# Altium PCB WiFi_Lock.PcbDoc
Units mil, origin at the board's own origin, x right, y up, seen from the top; angles counter-clockwise.
Board outline 2560 x 1180 mil, 2 copper layers (Top Layer, Bottom Layer); 49 components, 35 nets, 174 pads, 195 vias.
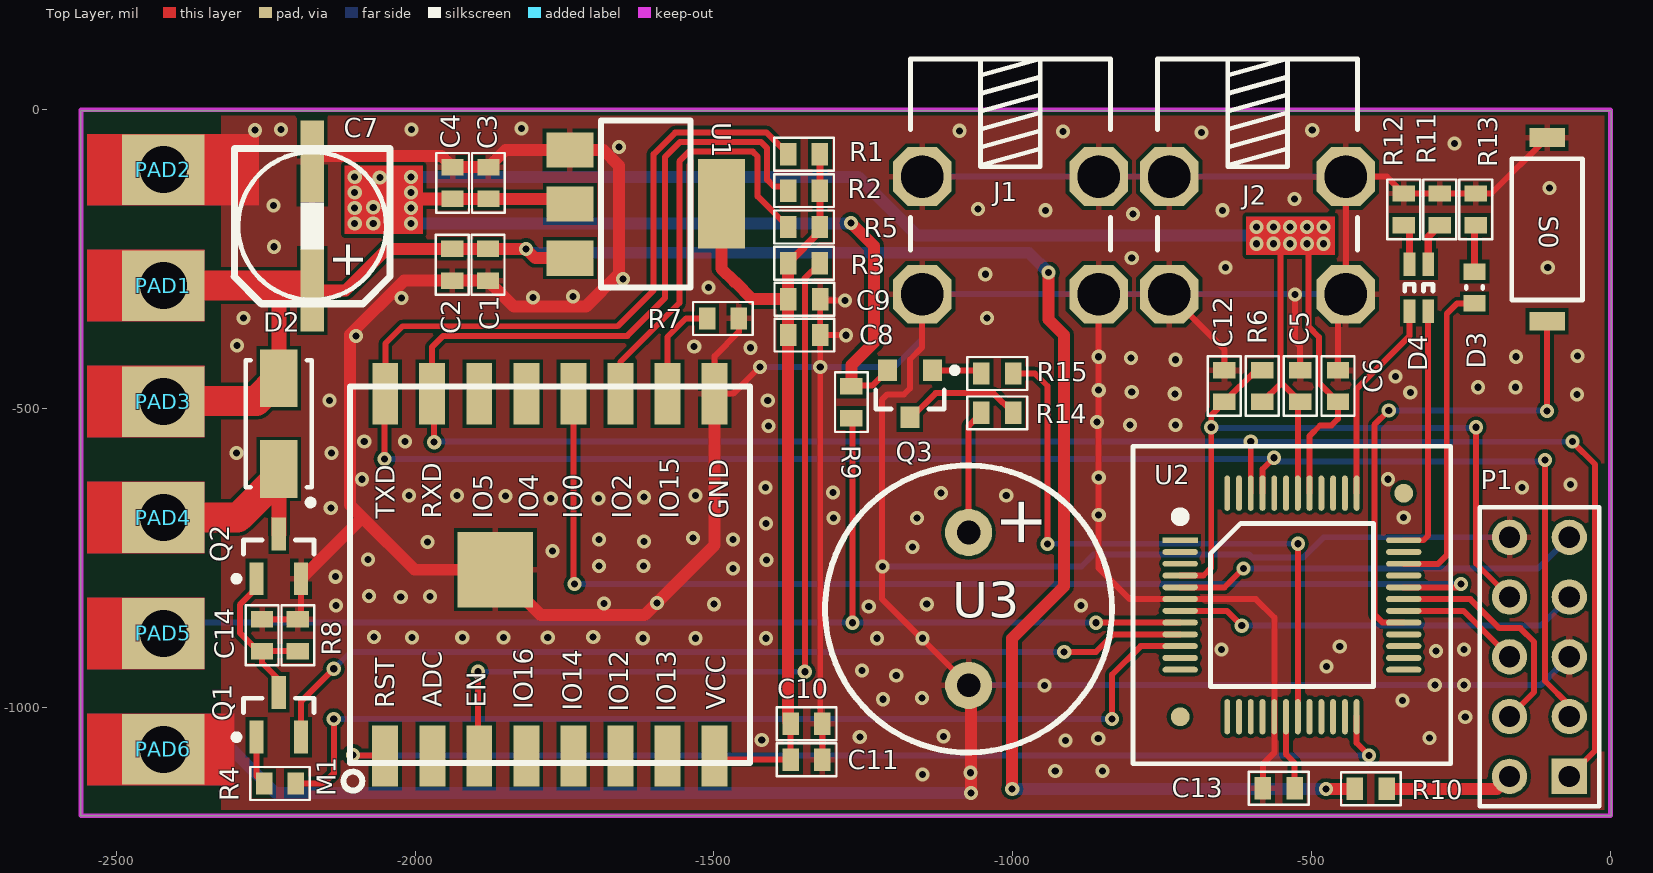
[diagram p0: Top Layer view]
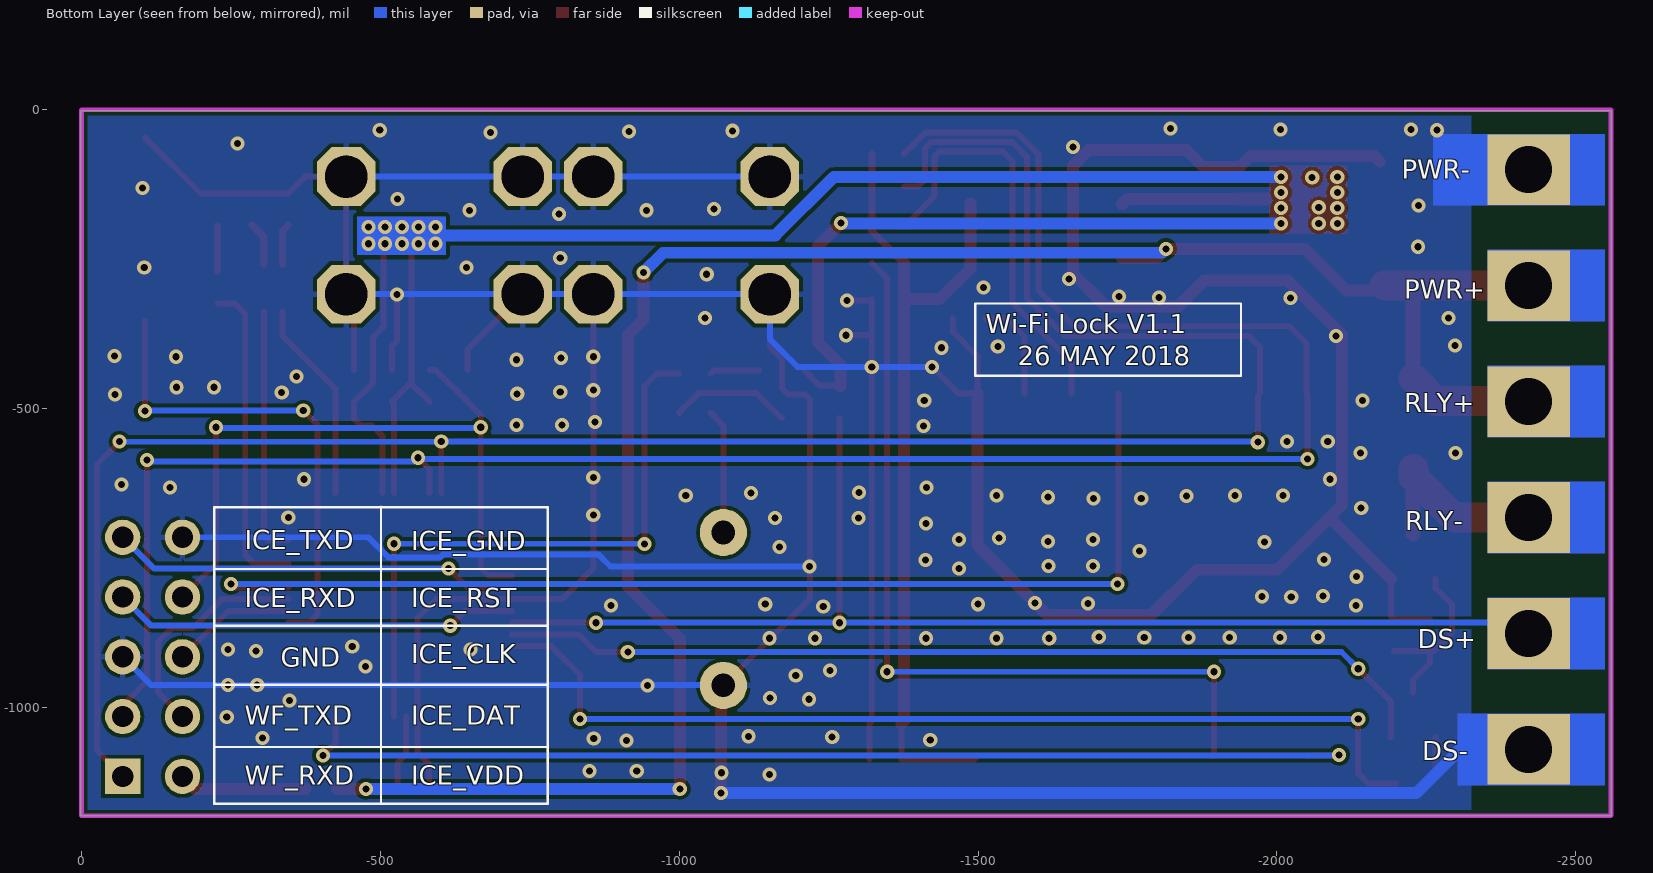
[diagram p1: Bottom Layer view, seen from below]

## Layer stack, top to bottom
Top Layer: signal copper 1.4
Dielectric: dielectric 12.6, FR-4, Dk 4.8
Bottom Layer: signal copper 1.4

## Board outline
-2559.06,-1.1 -2559.06,-1181.1 0.94,-1181.1 0.94,-1.1 -2559.06,-1.1

## Design rules (kind name [scope] priority, off if disabled: settings)
Clearance [All] p1: gap=6
HoleSize [All] p1: absolutevalues=TRUE maxlimit=248.03 minlimit=7.87 maxpercent=80.000 minpercent=20.000
MinimumSolderMaskSliver [All] p1: minsoldermaskwidth=0
PolygonConnect PolygonConnect_Via [IsVia] p1: connectstyle=Direct reliefconductorwidth=10 reliefentries=4 polygonreliefangle="90 Angle"
PolygonConnect [All] p2: connectstyle=Relief reliefconductorwidth=10 reliefentries=4 polygonreliefangle="90 Angle"
RoutingVias [All] p1: holewidth=15.75 width=19.68 viastyle="Through Hole" minholewidth=11.81 minwidth=23.62 maxholewidth=248.03 maxwidth=259.84
SilkToSilkClearance [All] p1: silktosilkclearance=0
SilkscreenOverComponentPads [IsPad] p1: minsilkscreentomaskgap=0
SolderMaskExpansion [All] p1: expansion=4
TestPointUsage [All] p1: valid=0 allowmultiple=FALSE
Testpoint [All] p1: side=3 testpointundercomponent=TRUE minsize=40 maxsize=100 preferedsize=60 minholesize=0 maxholesize=40 preferedholesize=32 testpointgrid=1 style=297 order=0-112345678
Width [All] p1: maxlimit=50 minlimit=5 preferedwidth=10
20 further rules are at their usual default settings.

## Components (designator, comment, footprint, x,y, rotation, side; value= is the part's Value field where it differs from the comment)
C1 "10uF" 0603 -1878,-259.02 r270 top
C2 "100nF" 0603 -1938,-259.02 r270 top
C3 "10uF" 0603 -1877.27,-122.24 r90 top
C4 "100nF" 0603 -1937.27,-122.24 r90 top
C5 "100nF" 0603 -519.33,-462 r90 top
C6 "100nF" 0603 -456,-462 r90 top
C7 "220uF" SMD-EC-F6.3 -2172,-302 r90 top
C8 "10uF" 0603 -1348.72,-376.73 r0 top
C9 "100nF" 0603 -1348.72,-316.73 r0 top
C10 "10uF" 0603 -1345,-1027 r0 top
C11 "100nF" 0603 -1345,-1087 r0 top
C12 "10uF" 0603 -646,-462 r90 top
C13 "10uF" 0603 -555,-1135 r180 top
C14 "100pF" 0603 -2256,-879 r90 top
D2 "SS32" DO-214AC -2228,-525 r270 top
D3 "LED" 0603 -227.46,-297 r90 top
D4 "LED" DLED2.00x1.25mm -320.73,-297.51 r270 top
J1 "Terminal Screw 4-PIN PCB RA" TERMSCREW4-B11.5X8.5X7.8mm/T5.0X7.5mm/RA -1003.94,-210 r180 top locked
J2 "Terminal Screw 4-PIN PCB RA" TERMSCREW4-B11.5X8.5X7.8mm/T5.0X7.5mm/RA -590.55,-210 r180 top locked
M1 "ESP07S" "ESP-07S Module" -1744,-778 r90 top
P1 "Header 2*5" HDR2X5T0.1 -169,-1115 r90 top
PAD1 "PWR+" PAD-MUL-ROUND-D1.5H0.6 -2421,-294 r90 top
PAD2 "PWR-" PAD-MUL-ROUND-D1.5H0.6 -2421,-100 r90 top
PAD3 "RLY+" PAD-MUL-ROUND-D1.5H0.6 -2421,-488 r90 top
PAD4 "RLY-" PAD-MUL-ROUND-D1.5H0.6 -2421,-682 r90 top
PAD5 "DS+" PAD-MUL-ROUND-D1.5H0.6 -2421,-876 r90 top
PAD6 "DS-" PAD-MUL-ROUND-D1.5H0.6 -2421,-1070 r90 top
Q1 "MMBT5401" SOT95P230X110-3N -2228,-1012 r90 top
Q2 "AO3400" SOT95P230X110-3N -2228,-747 r90 top
Q3 "MMBT5401LT1G" ONSC-SOT-23-3-318-08_V -1172,-475 r270 top
R1 "10k" 0603 -1349.2,-74 r0 top
R2 "10k" 0603 -1349.2,-135 r0 top
R3 "4.7k" 0603 -1349.2,-256.44 r0 top
R4 "10k" 0603 -2226,-1127 r180 top
R5 "4.7k" 0603 -1349.2,-196 r0 top
R6 "10k" 0603 -582.67,-462 r90 top
R7 "4.7k" 0603 -1485,-349 r0 top
R8 "33k" 0603 -2196,-879 r270 top
R9 "33k" 0603 -1270,-489 r90 top
R10 "0R" 0603 -401,-1136 r180 top
R11 "100R" 0603 -285.73,-166.49 r270 top
R12 "100R" 0603 -345.73,-166.49 r270 top
R13 "100R" 0603 -225.73,-166.49 r270 top
R14 "51R" 0603 -1026,-507 r0 top
R15 "4.7k" 0603 -1026,-441 r0 top
S0 "KEY0" SW6.00x3.00mm -106,-200 r90 top
U1 "AMS1117" SOT-223 -1741,-67 r270 top
U2 "M0516LDN" LQFP-48 -720,-720 r0 top
U3 "AT-1220-TT-R" Transducer_12mm(D)x8.5mm(H)_6.5mm(P) -1074,-835 r270 top

## Footprints (in the part's own frame and the unit in brackets; to place one, negate y for a bottom-side part, rotate by r counter-clockwise, add the part's x,y. Pads: shape width x height; smd on the part's side, far side on the other; paste and mask are expansions set on the pad)
0603 [mm] "0603 Chip Component, 2-Leads, Body 1.6x0.8mm, IPC Medium Density"
  rect 0.7x0.95 smd: 1(-0.675,0) 2(0.675,0)
  silkscreen extent -1.27,-0.7 1.27,0.7, body extent -0.77,-0.43 0.77,0.43, height 0.5
DLED2.00x1.25mm [mm] "Dual color LED, 4-Leads, Body 2.00x1.25mm, IPC Medium Density"
  rect 1x0.5 smd: 1(-1,0.4) 2(1,0.4) 3(-1,-0.4) 4(1,-0.4)
  silkscreen extent -0.15,-0.6 0.15,0.6, body extent -1.05,-0.67 1.05,0.67, height 1.1
DO-214AC [mm] "Molded Diode, 2-Leads, Body 5.0x2.5mm, IPC Medium Density"
  rect 2.45x1.6 smd: 1(1.925,0) 2(-1.925,0)
  silkscreen extent -2.7,-1.4 3.47,1.48, body extent -2.65,-1.4 2.65,1.4, height 2.3
"ESP-07S Module" [mm]
  rect 3.2x3.2 smd: 0(0.22,3.092)
  rect 2.6x1.1 smd: 1(-7.7,7.775) 2(-7.7,5.762) 3(-7.7,3.775) 4(-7.7,1.775) 5(-7.7,-0.225) 6(-7.7,-2.225) 7(-7.7,-4.225) 8(-7.7,-6.225) 9(7.7,-6.225) 10(7.7,-4.225) 11(7.7,-2.225) 12(7.7,-0.225) 13(7.7,1.775) 14(7.7,3.775) 15(7.7,5.775) 16(7.7,7.769)
  silkscreen extent -9.16,-7.73 8,9.54
HDR2X5T0.1 [mm] "Connector; Header; 2x5 Position; 2.54mm Pitch"
  rect 1.5x1.5 hole 0.9: 1(0,-2.54)
  round 1.5 hole 0.9: 2(0,0) 3(2.54,-2.54) 4(2.54,0) 5(5.08,-2.54) 6(5.08,0) 7(7.62,-2.54) 8(7.62,0) 9(10.16,-2.54) 10(10.16,0)
  silkscreen extent -1.27,-3.81 11.43,1.27
LQFP-48 [mm]
  rect 1.5x0.25 smd: 1(0,0)
  oval 1.5x0.25 smd: 2(0,-0.5) 3(0,-1) 4(0,-1.5) 5(0,-2) 6(0,-2.5) 7(0,-3) 8(0,-3.5) 9(0,-4) 10(0,-4.5) 11(0,-5) 12(0,-5.5) 25(9.5,-5.5) 26(9.5,-5) 27(9.5,-4.5) 28(9.5,-4) 29(9.5,-3.5) 30(9.5,-3) 31(9.5,-2.5) 32(9.5,-2) 33(9.5,-1.5) 34(9.5,-1) 35(9.5,-0.5) 36(9.5,0)
  oval 0.25x1.5 smd: 13(2,-7.5) 14(2.5,-7.5) 15(3,-7.5) 16(3.5,-7.5) 17(4,-7.5) 18(4.5,-7.5) 19(5,-7.5) 20(5.5,-7.5) 21(6,-7.5) 22(6.5,-7.5) 23(7,-7.5) 24(7.5,-7.5) 37(7.5,2) 38(7,2) 39(6.5,2) 40(6,2) 41(5.5,2) 42(5,2) 43(4.5,2) 44(4,2) 45(3.5,2) 46(3,2) 47(2.5,2) 48(2,2)
  round 0.8 smd: ""(0,-7.5) ""(9.5,2)
  silkscreen extent -2,-9.5 11.5,4
ONSC-SOT-23-3-318-08_V [mm] "SOT23, 3-Leads, Body 2.92x1.3mm, Pitch 0.95mm"
  rect 0.9x0.8 smd: 1(-1,0.95) 2(-1,-0.95) 3(1,0)
  silkscreen extent -1.12,-1.46 0.65,2.03, body extent -0.65,-1.46 0.65,1.46, height 1.11
PAD-MUL-ROUND-D1.5H0.6 [mm]
  rect 3x3.5 hole 2: 1(0,0)
SMD-EC-F6.3 [mm]
  rect 3.5x1 smd: 1(0,0) 2(5.475,0)
  silkscreen extent -0.56,-3.31 6.04,3.31
SOT95P230X110-3N [mm] "SOT23, 3-Leads, Body 2.90x2.30mm, Pitch 0.95mm, IPC Medium Density"
  rect 1.4x0.6 smd: 1(-0.95,0.95) 2(-0.95,-0.95) 3(0.95,0)
  silkscreen extent -1.07,-1.5 0.7,1.92, body extent -0.7,-1.5 0.7,1.5, height 1.1
SOT-223 [mil]
  rect 59x79 smd: 1(0,0) 2(90.55,0) 3(181.1,0)
  rect 150x79 smd: 4(89.88,253.54)
  silkscreen extent -49,52 231,202
SW6.00x3.00mm [mm] "Tact Switch, 2 Leads, Body 6.00(L) x 3.00(W) x 5.00(H) mm"
  rect 0.8x1.5 smd: 1(-3.9,0) 2(3.9,0)
  silkscreen extent -3,-1.5 3,1.5, body extent -3,-1.5 3,1.5, height 0.48
TERMSCREW4-B11.5X8.5X7.8mm/T5.0X7.5mm/RA [mm] "Terminal Screw, 4-PIN, Body 11.5mm(L) * 8.5mm(W) * 7.8mm(H), Thru Hole, 5.0mm * 7.5mm Pitch, Right Angle"
  oct 2.5x2.5 hole 1.8: 1(-3.75,2.5) 2(3.75,2.5) 3(-3.75,-2.5) 4(3.75,-2.5)
  silkscreen extent -4.25,-7.5 4.25,0.64, body extent -4.25,-7.5 4.25,4, height 16
Transducer_12mm(D)x8.5mm(H)_6.5mm(P) [mm] "Transducer, Body Dia 12.00mm, Height 8.7mm (max), 6.5mm Pitch"
  round 2 hole 1: 1(-3.25,0) 2(3.25,0)
  silkscreen extent -6.1,-6.1 6.1,6.1

## Part data
C1 C2 C3 C4 C5 C6 C8 C9 C10 C11 C12 C13 C14: library part CAP0603, "CAP0603"
C7: library part EEE-FPC221XAP, "220μF 16V Aluminum Electrolytic Capacitors Radial, Can - SMD 160 mohm @ 100kHz 2000 Hrs @ 105°C"
D2: library part Diode
D3: "Typical INFRARED GaAs LED"
D4: library part LED-RB, "Red & Blue"
J1 J2: "Terminal Screw 4-PIN, Thru Hole, PCB Right Angle"
M1: library part "ESP-07S Module", "ESP-07S Wi-Fi Module"
P1: "Header, 2-Pin, Dual row"
PAD1 PAD2 PAD3 PAD4 PAD5 PAD6: library part PAD, "Probe, Test Point"
Q1: "PNP General Purpose Amplifier"
Q2: "30V 5.8A N-Channel MOSFET, MAX VGS = 1.45V"
Q3: "High Voltage Transistor, PNP Silicon, 3-Pin SOT-23, Pb-Free, Tape and Reel"
R1 R2 R3 R4 R5 R6 R7 R8 R9 R10 R11 R12 R13 R14 R15: library part RES
S0: library part SW-TACT, "Top push Switch"
U1: "三端线性稳压"
U2: "ARM Cortex -M0 32-bit Microcontroller"
U3: "Buzzers Transducer, Externally Driven Magnetic 1.5V 10mA 2.048kHz 82dB @ 1.5V, 10cm Through Hole PC Pins"

## Via types
v1: diameter 23.62, hole 11.81, Top Layer to Bottom Layer, tented both sides, 189 vias
v2: diameter 23.62, hole 11.81, Top Layer to Bottom Layer, 6 vias

## Nets (pads, with @x,y where several pads share a name; then routed paths per layer and width w, separated by ;. In a path a pad name is that pad's centre, name@x,y a point inside that pad or via, vN(x,y) a via of type N, cw(c..) or ccw(c..) an arc to the next point about the centre after c; other vN are vias at no path point)
+3.3V: C3.1 C4.1 C5.1 C6.1 Q3.2 R6.1 R9.2 U1.2 U2.41 U2.42 | length 3844.5
  Top Layer w10: R9.2@-1270,-461.43 -1235.2,-461.43 Q3.2 ; R6.1 -552,-457.91 -552,-455.91 ; v1(-564,-196) -564,-201 -552,-213 -552,-455.91 ; U2.42 -523.15,-492.39 C5.1 -552,-455.91 ; -512,-210 -505,-217 -505,-363 -488,-380 -488,-456.57 C6.1 -456,-517 -467,-528 -486,-528 -503.46,-545.46 U2.41
  Top Layer w20: C4.1 C3.1 -1749.73,-148.82 U1.2 ; v1(-1271,-189) -1232,-228 -1232,-389 -1270,-427 -1270,-461.43 R9.2
  Bottom Layer w20: v1(-2007,-190) -1272,-190 v1(-1271,-189) ; v1(-2007,-112) -1259,-112 -1161,-210 -512,-210
  other v1: -592,-224 -564,-224 -536,-224 -508,-224 -480,-224 -592,-196 -536,-196 -508,-196 -480,-196 -2101,-190 -2070,-190 -2101,-164 -2007,-164 -2070,-163 -2101,-138 -2007,-138 -2059,-113 -2101,-112
+3.3V_WIFI: C8.1 C9.1 C10.1 C11.1 M1.8 R1.2 R2.2 R3.1 R5.2 U1.4 | length 1454.6
  Top Layer w10: M1.8 -1493.07,-1087 C11.1 C10.1 ; C8.1 C8.1@-1371.57,-380.45
  Top Layer w12: R3.1 -1322,-202.66 R5.2@-1322,-194 ; R2.2 R1.2 ; R5.2@-1322.43,-196 R2.2@-1322.43,-135 ; R2.2@-1322,-138 R2.2@-1322,-128
  Top Layer w20: U1.4 -1487.46,-265.54 -1465.27,-287.73 -1464.59,-287.73 -1435.59,-316.73 C9.1@-1375.78,-316.73 ; -1375.81,-348.25 -1375.81,-1022.76 C10.1 ; C8.1@-1375.78,-376.73 C9.1@-1375.78,-316.73 ; R3.1 C9.1@-1375.78,-316.73 ; C9.1 C9.1@-1375.78,-316.73
+12V: C1.1 C2.1 C7.1 D2.2 PAD1.1 PAD3.1 R10.2 U1.3 | length 3458.8
  Top Layer w20: C7.1 -2116,-302 -2046.44,-232.44 C2.1 C1.1 v1(-1814.56,-232.44) -1798.9,-248.1 U1.3 ; v1(-1001,-1136) -1001,-884 -914.19,-797.19 -914.19,-376.81 -940,-351 v1(-940,-272) ; v1(-476,-1136) R10.2
  Top Layer w25: -2229,-294 -2228,-295 D2.2 D2.2@-2228,-461
  Top Layer w50: PAD3.1 -2420,-487 -2265.79,-487 D2.2 ; PAD1.1 -2229,-294 C7.1@-2180,-294
  Bottom Layer w20: v1(-1814.56,-232.44) -1808,-239 -973,-239 v1(-940,-272) ; v1(-1001,-1136) v1(-476,-1136)
DETECT: PAD5.1 R9.1 U2.8 | length 2051
  Top Layer w10: v1(-1268,-858) R9.1@-1268,-515.57 ; v1(-861,-858) -860.79,-857.8 U2.8
  Bottom Layer w10: PAD5.1 -2403,-858 -1291,-858 v1(-861,-858)
FWUPD: M1.12 U2.32 | length 1900.4
  Top Layer w10: M1.12 -1735.14,-790.86 v1(-1733,-793) ; U2.32 -255.74,-798.74 v1(-250,-793)
  Bottom Layer w10: v1(-1733,-793) v1(-250,-793)
GND: C1.2 C2.2 C3.2 C4.2 C5.2 C6.2 C7.2 C8.2 C9.2 C10.2 C11.2 C12.2 C13.2 C14.2 J1.1 J1.2 J1.3 J1.4 J2.1 J2.2 J2.3 J2.4 M1.0 M1.9 P1.5 P1.10 PAD2.1 PAD6.1 Q2.2 R7.2 R8.1 R11.1 R12.1 R13.1 S0.2 U1.1 U2.6 U2.17 U3.2 | length 12206.5
  Top Layer w10: C14.2 R8.1 -2190.6,-847.02 Q2.2 ; R7.2 -1458.43,-371.43 -1498.92,-411.92 M1.9 -1467.85,-474.85 v1(-1423,-430) ; C11.2 C10.2 -1322.14,-1023.28 v1(-1322.14,-430) C8.2 ; v1(-1281,-319) -1319.87,-319 C9.2 C8.2 ; v1@-1279.27,-376.73 C8.2 ; J1.2 -1151.57,-397.14 -1172,-417.57 -1172,-466 -1182,-476 -1210,-476 -1219,-485 -1219,-817.95 U3.2 U3.2@-1074,-944 ; J1.1 -856.3,-766.7 -804.57,-818.43 U2.6 -593.42,-818.43 -562.52,-849.33 U2.17 -562.52,-1075.53 -581.57,-1094.58 C13.2 ; J2.2 -646,-400.61 C12.2 ; v1(-528,-309) -528,-387 -519.33,-395.67 C5.2 ; C6.2 -456,-321.51 J2.1 J2.3 -374.07,-111.57 R12.1 R11.1 R13.1 -199.46,-139.91 S0.2
  Top Layer w20: Q2.2 -2088.24,-682.05 -2087.95,-682.05 ; C7.2 -2162.54,-77 -1955.94,-77 C4.2 C3.2 -1848.6,-67 U1.1 -1685,-67 -1659,-93 -1659,-274 -1714,-329 -1834.59,-329 C1.2 C2.2 -2018.59,-285.59 -2109.16,-376.16 -2109.16,-660.84 -2087.95,-682.05 ; M1.9 -1498.92,-727.92 -1616,-845 -1790.07,-845 M1.0 -2000.66,-769.34 -2087.95,-682.05 ; v1(-1070,-1143) U3.2@-1070,-966.95
  Bottom Layer w10: v1(-1423,-430) v1(-1322.14,-430) -1198,-430 -1151.57,-383.57 J1.2 J1.1 J2.2 J2.1 ; v1(-1218,-764) -885,-764 -865.19,-744.19 -604.55,-744.19 -600.08,-748.66 -513.7,-748.66 -480.04,-715 P1.10 ; J1.4 J1.3 J2.4 J2.3 ; U3.2 -1073.05,-962 -116,-962 P1.5
  Bottom Layer w20: PAD6.1 -2419,-1072 -2304,-1072 -2233,-1143 v1(-1070,-1143)
  other v1: -1151,-1112 -1071,-1109 -929,-1106 -850,-1106 -912,-1055 -1420,-1054 -857,-1052 -303,-1051 -1256,-1049 -1116,-1048 -243,-1016 -348,-988 -1217,-986 -1152,-984 -947,-963 -294,-962 -245,-962 -1195,-946 -1252,-938 -475,-931 -292,-905 -651,-903 -245,-903 -453,-898 -1619,-884 -1531,-884 -1413,-884 -1227,-884 -1151,-884 -2005,-883 -1921,-883 -1852,-883 -1778,-883 -2069,-882 -1702,-882 -1241,-831 -2132,-829 -886,-829 -1500,-827 -1144,-827 -1684,-826 -1595,-825 -2024,-815 -1975,-814 -2077,-813 -2133,-781 -1468,-767 -1692,-763 -1618,-763 -1412,-753 -2079,-752 -1770,-738 -1168,-731 -1979,-723 -1617,-722 -1692,-719 -1468,-719 -1535,-716 -1413,-692 -1160,-683 -856.3,-678 -2141,-666 -1773,-650 -1693,-650 -1617,-648 -1849,-646 -2010,-645 -1930,-645 -1531,-645 -1011,-645 -1120,-641 -1414,-632 -148,-632 -67,-627 -2089,-618 -856.3,-615 -2299,-574 -2140,-574 -2085,-555 -2017,-555 -1409,-529 -804,-527 -728,-527 -859,-522 -2143,-486 -1410,-486 -56,-476 -729,-475 -801,-472 -856.3,-469 -222,-464 -159,-464 -728,-418 -802,-415 -856.3,-413 -158,-413 -55,-412 -1439,-398 -1533,-396 -2298,-394 -2099,-378 -1279,-377 -2287,-348 -1043,-348 -2023,-315 -1803,-314 -1736,-312 -1509,-297 -1652,-283 -1046,-275 -644,-264 -105,-264 -801,-248 -2236,-229 -799,-174 -945,-168 -649,-168 -1058,-166 -2237,-160 -529,-149 -102,-131 -1659,-62 -261,-56 -684,-38 -916,-36 -1089,-35 -2268,-34 -499,-34 -2224,-33 -2006,-33 -1822,-31
  other v2: -1300,-683 -346,-682 -1301,-640 -372,-618 -335,-473 -360,-446
ICE_CLK: P1.6 U2.30 | length 208.8
  Top Layer w10: U2.30 -245.89,-838.11 P1.6
ICE_DAT: P1.4 U2.31 | length 389.6
  Top Layer w10: U2.31 -234.57,-818.43 -186,-867 -151,-867 -128,-890 -128,-974 P1.4
ICE_RST: C12.1 P1.8 R6.2 U2.4 | length 1180.3
  Top Layer w10: U2.4 -681.05,-779.06 -668,-766 -668,-510.57 C12.1 -592.85,-435.43 R6.2 ; v1(-225,-531) -225,-759 P1.8
  Bottom Layer w10: v1(-668,-531) -667,-532 -226,-532 v1(-225,-531)
ICE_RXD: P1.7 U2.7 | length 681.2
  Top Layer w10: U2.7 -641.89,-838.11 v1(-617,-863)
  Bottom Layer w10: v1(-617,-863) -117,-863 P1.7
ICE_TXD: P1.9 U2.5 | length 685.7
  Top Layer w10: U2.5 -645.74,-798.74 v1(-614,-767)
  Bottom Layer w10: v1(-614,-767) -121,-767 P1.9
LED_SYS: D3.1 U2.34 | length 535.7
  Top Layer w10: U2.34 -288.37,-759.37 -274,-745 -274,-341 -256.57,-323.57 D3.1
LED_WIFI_B: D4.4 U2.37 | length 340.9
  Top Layer w10: U2.37 -424.72,-466.72 -336.48,-378.48 D4.4
LED_WIFI_R: D4.2 U2.36 | length 419.4
  Top Layer w10: U2.36 -313,-720 -304.98,-711.98 D4.2
MCU2WIFI: M1.15 P1.1 R2.1 U2.46 | length 3682.9
  Top Layer w10: v1(-1968,-556) -1968,-478.21 M1.15 -1971.36,-396.36 -1953,-378 -1645,-378 -1582,-315 -1582,-79 -1557,-54 -1421,-54 -1411,-64 -1411,-117 -1399.78,-128.22 R2.1@-1375.78,-128.22 ; U2.46 v1(-601.89,-555.11) ; P1.1 -26,-1072 -26,-592.94 v1(-63.88,-555.07)
  Bottom Layer w10: v1(-1968,-556) -1967.11,-555.11 -599.67,-555.11 -598.78,-556 v1(-63.88,-555.07)
NetC13_1: C13.1 U2.18 | length 125.7
  Top Layer w10: U2.18 -542.83,-1078.18 -528.43,-1092.59 C13.1
NetC14_1: C14.1 Q1.3 Q2.1 R8.2 | length 292.3
  Top Layer w10: Q2.1 -2265.4,-800.4 -2293,-828 -2293,-875 -2262.43,-905.57 C14.1 ; Q1.3 -2228,-953 -2256,-925 C14.1 ; R8.2 C14.1
NetD2_1: D2.1 PAD4.1 Q2.3 | length 330.3
  Top Layer w25: Q2.3 D2.1@-2228,-614
  Top Layer w50: PAD4.1 -2297,-682 -2294,-679 -2293,-679 -2228,-614 D2.1 D2.1@-2228.21,-601
NetD3_2: D3.2 R13.2 | length 78.1
  Top Layer w10: R13.2@-227.46,-194.8 R13.2
  Top Layer w12: D3.2 R13.2@-227.46,-194.8
NetD4_1: D4.1 R11.2 | length 73.1
  Top Layer w12: D4.1 -304.98,-212.32 R11.2
NetD4_3: D4.3 R12.2 | length 68.9
  Top Layer w12: R12.2 -336.48,-202.32 D4.3
NetM1_3: M1.3 R3.2 | length 1386
  Top Layer w10: v1(-1895,-940) -1895,-1078.77 M1.3 ; v1(-1348,-940) -1348,-281 ; -1348,-283.24 -1348.72,-282.53 R3.2
  Bottom Layer w10: v1(-1895,-940) v1(-1348,-940)
NetM1_10: M1.10 R7.1 | length 174
  Top Layer w10: M1.10 -1577.66,-379.66 -1547,-349 R7.1
NetM1_11: M1.11 R5.1 | length 709.8
  Top Layer w10: M1.11 -1656.4,-421.4 -1558,-323 -1558,-86 -1542,-70 -1435,-70 -1427,-78 -1427,-144.78 R5.1
NetP1_2: P1.2 R10.1 | length 214.1
  Top Layer w20: R10.1 -190,-1136 P1.2
NetQ1_1: Q1.1 R4.2 | length 82.9
  Top Layer w10: Q1.1 -2265.4,-1114.17 R4.2
NetQ3_1: Q3.1 R15.1 | length 84.2
  Top Layer w10: Q3.1 -1057.94,-435.63 R15.1
NetQ3_3: Q3.3 R14.2 | length 203
  Top Layer w10: Q3.3 -1169.37,-514.37 -1129,-474 -1032.43,-474 R14.2
NetR14_1: R14.1 U3.1 | length 208.9
  Top Layer w10: U3.1 -1074,-528.43 R14.1
NetR15_2: R15.2 U2.19 | length 1038.5
  Top Layer w10: R15.2 -963,-441 -942,-462 v1(-942,-726) ; U2.19 v1(-523.15,-725.85)
  Bottom Layer w10: v1(-942,-726) -941.85,-725.85 v1(-523.15,-725.85)
NetS0_1: S0.1 U2.29 | length 821.5
  Top Layer w10: v1(-371,-503) -395,-527 -395,-844 -381.2,-857.8 U2.29 ; v1(-106,-504) S0.1
  Bottom Layer w10: v1(-371,-503) -107,-503 v1(-106,-504)
OPEN: R4.1 U2.10 | length 1671.3
  Top Layer w10: R4.1 -2153,-1127 -2136,-1110 v1(-2136,-1019) ; v1(-834,-1019) -834,-945 -786.16,-897.17 U2.10
  Bottom Layer w10: v1(-2136,-1019) v1(-834,-1019)
OPEN_PU: Q1.2 U2.9 | length 1576.8
  Top Layer w10: Q1.2 -2190.6,-989.6 v1(-2136,-935) ; v1(-914,-907) -861,-907 -831.48,-877.48 U2.9
  Bottom Layer w10: v1(-2136,-935) -2108,-907 v1(-914,-907)
RST_WIFI: M1.1 U2.24 | length 1828.5
  Top Layer w10: v1(-2104,-1079) -2103,-1080 -2051.25,-1080 M1.1 ; U2.24 -424.72,-1059.28 v1(-404,-1080)
  Bottom Layer w10: v1(-2104,-1079) -2103,-1080 v1(-404,-1080)
WIFI2MCU: M1.16 P1.3 R1.1 U2.45 | length 3647.1
  Top Layer w10: v1(-2051,-584) -2051,-475.98 M1.16 -2049.87,-390.87 -2021,-362 -1661,-362 -1601,-302 -1601,-74 -1565,-38 -1411.78,-38 R1.1 -1393.78,-56 ; U2.45 -582.2,-601.2 v1(-563,-582) ; v1(-109.53,-585.47) -109.53,-955.53 -69,-996.06 P1.3
  Bottom Layer w10: v1(-2051,-584) -565,-584 v1(-563,-582) -557,-588 -112.06,-588 v1(-109.53,-585.47)
pads on no net: M1.2 M1.4 M1.5 M1.6 M1.7 M1.13 M1.14 U2. U2.1 U2.2 U2.3 U2.11 U2.12 U2.13 U2.14 U2.15 U2.16 U2.20 U2.21 U2.22 U2.23 U2.25 U2.26 U2.27 U2.28 U2.33 U2.35 U2.38 U2.39 U2.40 U2.43 U2.44 U2.47 U2.48

## Polygon pours and split planes (outlines as drawn)
GND on Top Layer "Top Layer-GND" (solid, remove dead copper, pour order 1000): -2324.47,0 -2324.47,-1181.1 0.53,-1181.1 0.53,0 -2324.47,0
GND on Bottom Layer "Top Layer-GND" (solid, remove dead copper, pour order 1001): -2325,0 0,0 0,-1181.1 -2325,-1181.1 -2325,0

## Keep-outs
Keep-Out Layer:
  lines w7.87: -2559.06,-1181.1 -2559.06,0 0,0 0,-1181.1 -2559.06,-1181.1

## Other copper
Top Layer:
  rectangle net +12V: -2549,-548 -2352,-428
  rectangle net GND: -2352,-1130 -2302,-1010
  rectangle net GND: -2352,-160 -2261,-40
  rectangle net +3.3V: -610,-243 -461,-178
  rectangle net +3.3V: -2118,-208 -1987,-93
  region net +3.3V: -1932,-138 -2015,-138 -2015,-160 -1932,-160
  rectangle net GND: -2549,-1130 -2352,-1010
  rectangle net DETECT: -2549,-936 -2352,-816
  rectangle net NetD2_1: -2549,-742 -2352,-622
  rectangle net +12V: -2549,-354 -2352,-234
  rectangle net GND: -2549,-160 -2352,-40
Bottom Layer:
  rectangle net DETECT: -2549,-936 -2352,-816
  rectangle net GND: -2352,-1130 -2302,-1010
  rectangle net GND: -2352,-160 -2261,-40
  rectangle net +3.3V: -610,-243 -461,-178
  rectangle net GND: -2549,-1130 -2352,-1010
  rectangle net NetD2_1: -2549,-742 -2352,-622
  rectangle net +12V: -2549,-548 -2352,-428
  rectangle net +12V: -2549,-354 -2352,-234
  rectangle net GND: -2549,-160 -2352,-40

## Silkscreen, mask and mechanical layers (free items; w line width, h text height)
Top Overlay:
  text "TXD" at -2034,-684 h32 r90
  text "RXD" at -1956,-684 h32 r90
  text "IO5" at -1871,-684 h32 r90
  text "IO4" at -1794,-684 h32 r90
  text "IO0" at -1720,-684 h32 r90
  text "IO2" at -1638,-684 h32 r90
  text "IO15" at -1559,-684 h32 r90
  text "GND" at -1476,-684 h32 r90
  text "ADC" at -1955,-999 h32 r90
  text "EN" at -1882,-1000 h32 r90
  text "RST" at -2035,-1001 h32 r90
  text "IO16" at -1803,-1003 h32 r90
  text "VCC" at -1481,-1004 h32 r90
  text "IO14" at -1721,-1005 h32 r90
  text "IO12" at -1643,-1007 h32 r90
  text "IO13" at -1564,-1007 h32 r90
Bottom Overlay:
  lines w3.94: -780,-1066 -222,-1066 ; -780,-962 -222,-962 ; -780,-863 -222,-863 ; -780,-768 -222,-768 ; -501,-1160 -501,-664 ; -1940,-445 -1940,-324 -1495,-324 -1495,-445 -1940,-445 ; -780,-1161 -780,-665 -222,-665 -222,-1161 -780,-1161
  text "Wi-Fi Lock V1.1" at -1513,-374 h32
  text "26 MAY 2018" at -1566,-427 h32
  text "ICE_TXD" at -273,-735 h32
  text "ICE_GND" at -552,-737 h32
  text "ICE_RST" at -552,-832 h32
  text "ICE_RXD" at -273,-832 h32
  text "ICE_CLK" at -552,-926 h32
  text "GND" at -333,-931.33 h32
  text "ICE_DAT" at -552,-1029 h32
  text "WF_TXD" at -273,-1029 h32
  text "ICE_VDD" at -552,-1129 h32
  text "WF_RXD" at -273,-1129 h32
Top Solder:
  rectangle: -2552,-1133 -2348,-1007
  rectangle: -2552,-939 -2348,-813
  rectangle: -2552,-745 -2348,-619
  rectangle: -2552,-551 -2348,-425
  rectangle: -2552,-357 -2348,-231
  rectangle: -2552,-163 -2348,-37
Bottom Solder:
  rectangle: -2552,-1133 -2348,-1007
  rectangle: -2552,-939 -2348,-813
  rectangle: -2552,-745 -2348,-619
  rectangle: -2552,-551 -2348,-425
  rectangle: -2552,-357 -2348,-231
  rectangle: -2552,-163 -2348,-37
Drill Drawing:
  text ".Legend" at -223,-1256 h32

## Text inside footprints (layer, text, board x,y; h text height)
C7: Top Overlay "+" at -2086.82,-285.06 h59.06 r90
U3: Top Overlay "+" at -1019,-735 h78.74 r270